# Altium PCB G4y_SuperCap.PcbDoc
Units mm, origin at the board's own origin, x right, y up, seen from the top; angles counter-clockwise.
Board outline 40 x 40 mm, 2 copper layers (Top Layer, Bottom Layer), stack 1.571 mm thick; 78 components, 61 nets, 229 pads, 119 vias.
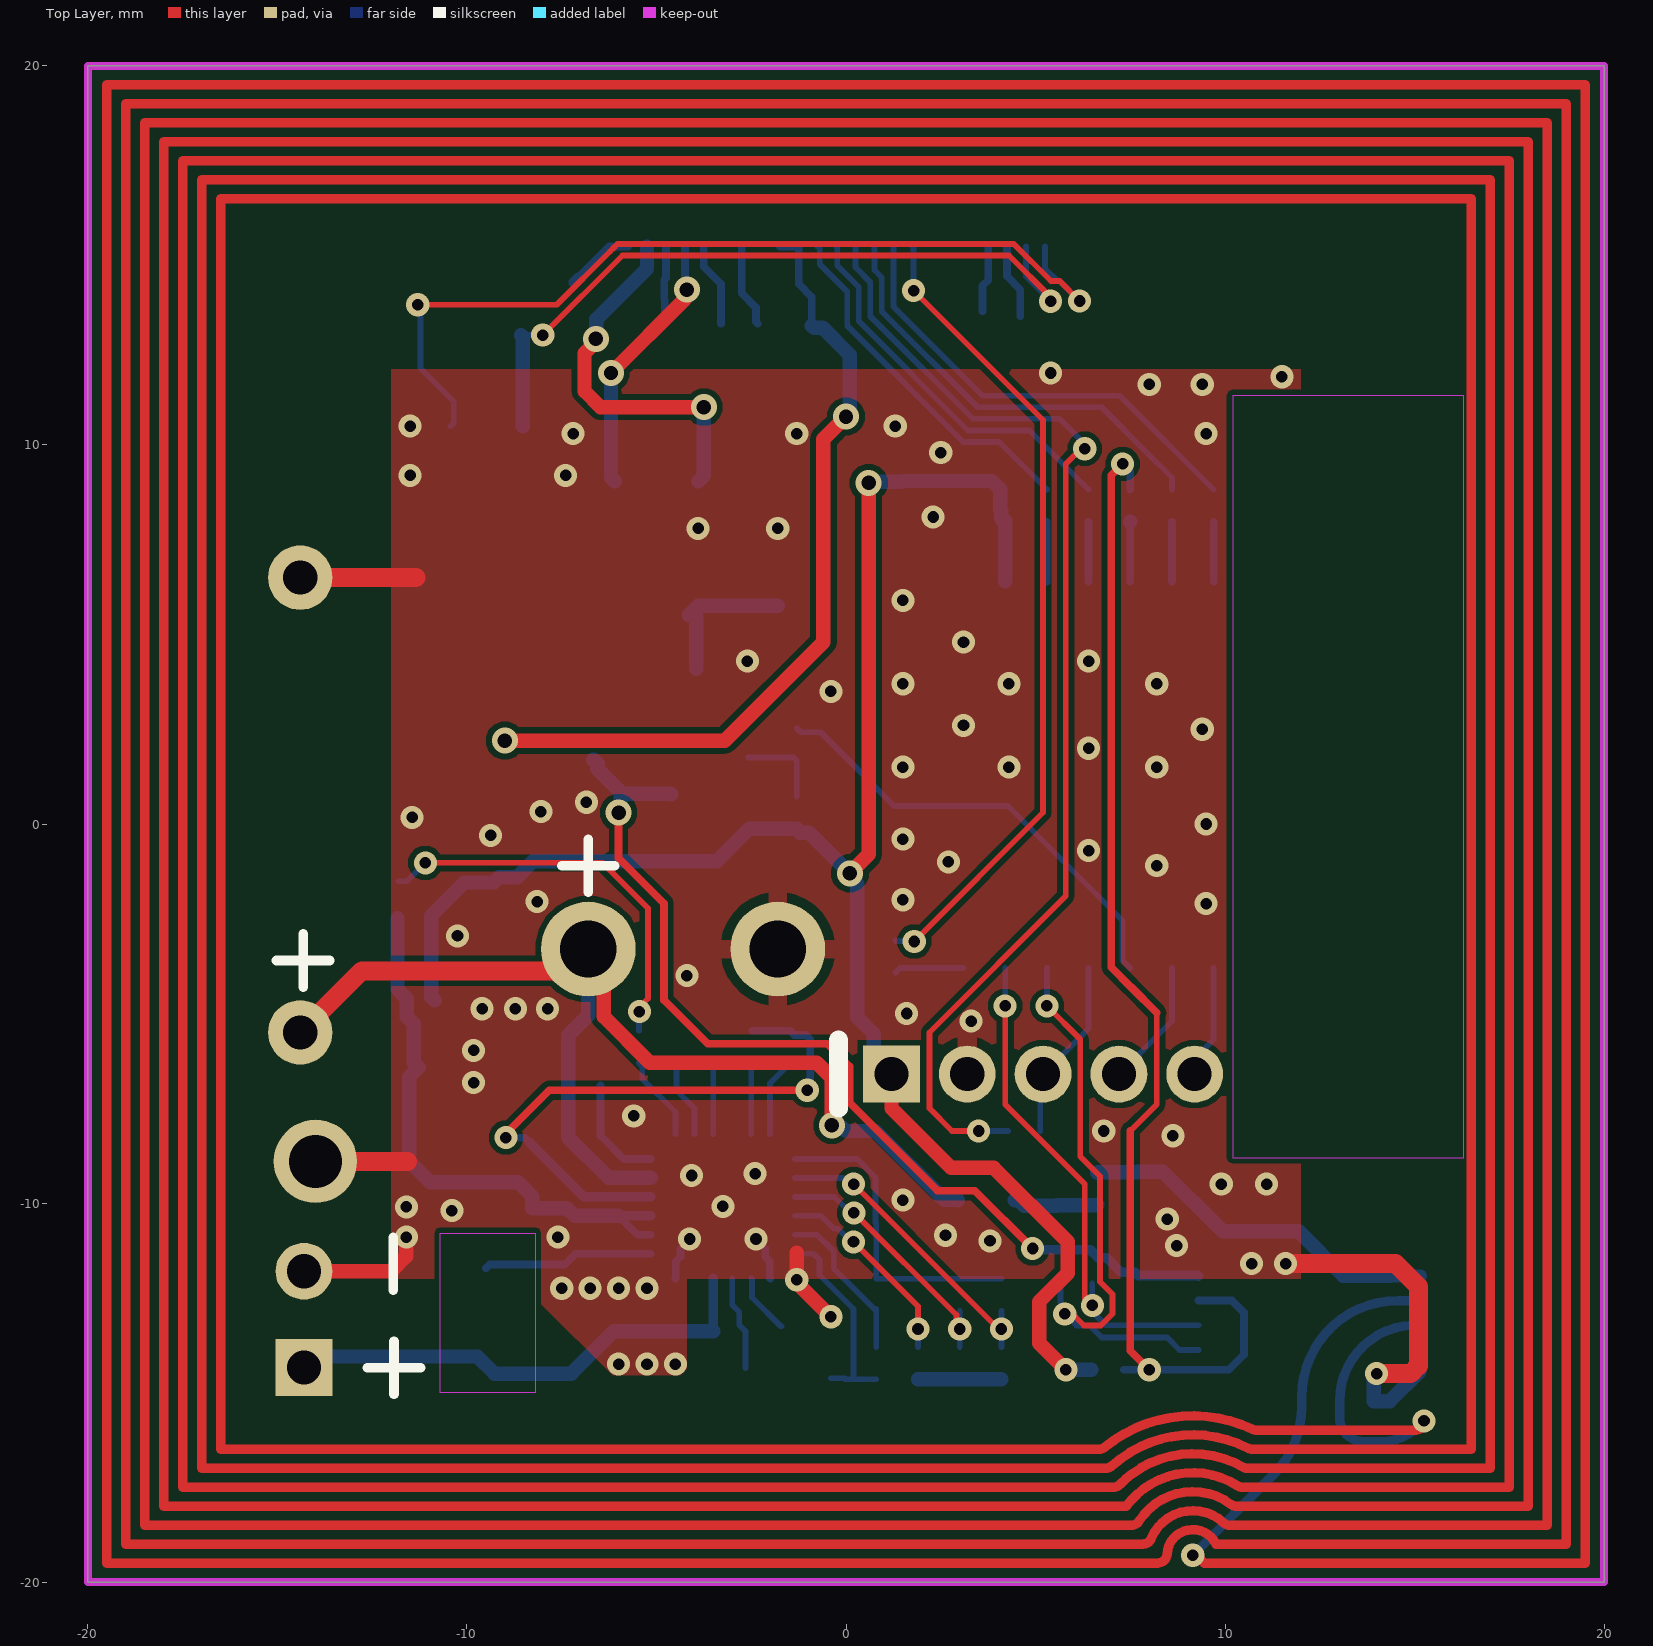
[diagram p0: Top Layer view]
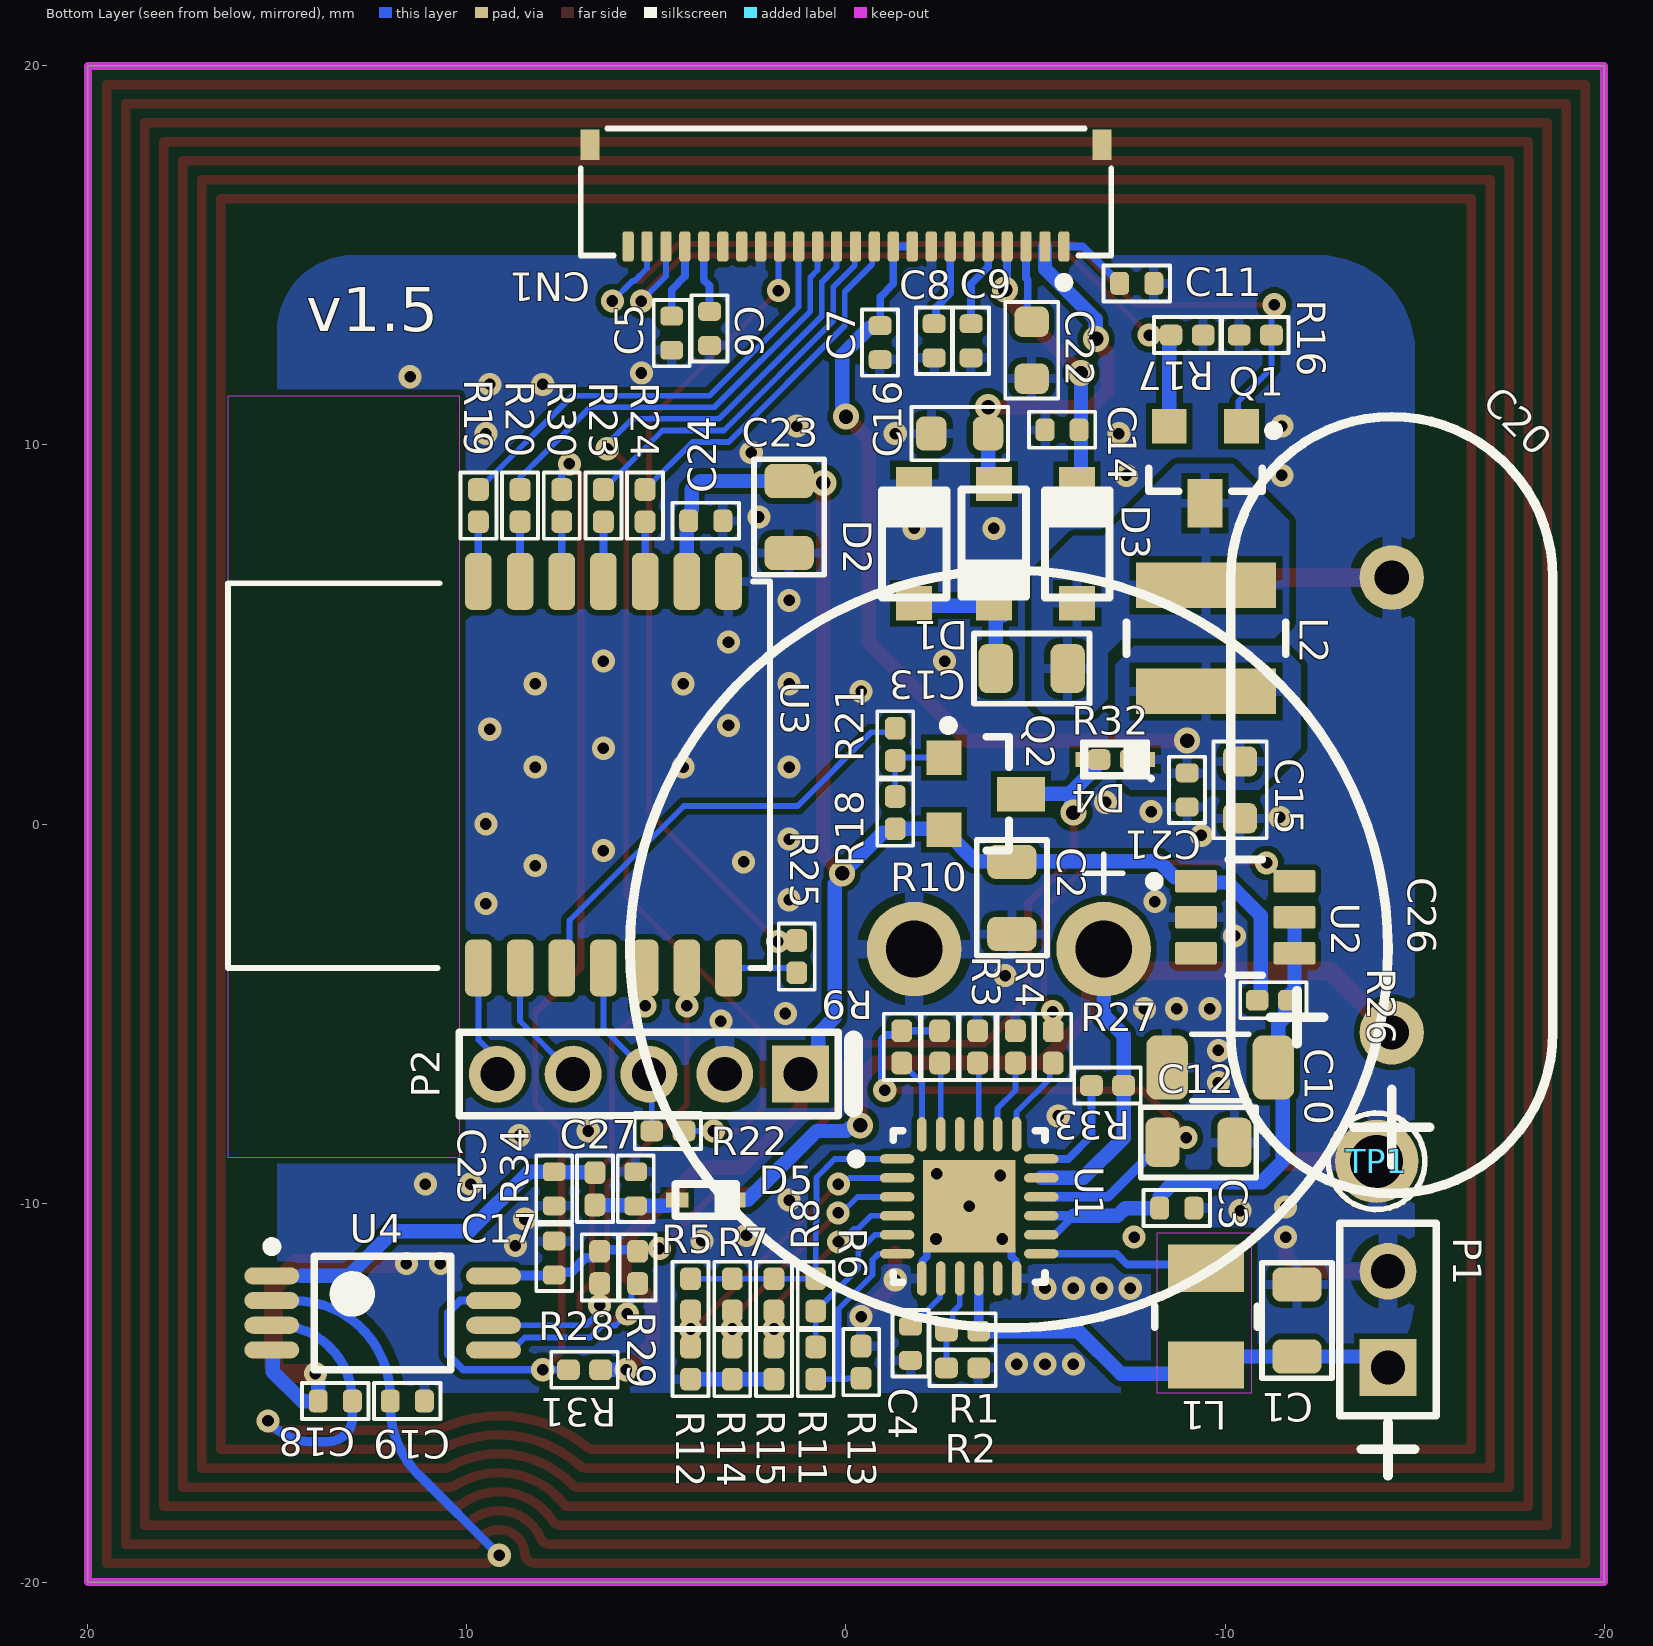
[diagram p1: Bottom Layer view, seen from below]

## Layer stack, top to bottom
Top Solder: solder mask 0.0102, Solder Resist, Dk 3.5
Top Layer: signal copper 0.0356
Dielectric 1: dielectric 1.5, FR-4, Dk 4.8
Bottom Layer: signal copper 0.0356
Bottom Solder: solder mask 0.0102, Solder Resist, Dk 3.5

## Board outline
-20,-20 20,-20 20,20 -20,20

## Design rules (kind name [scope] priority, off if disabled: settings)
Clearance Clearance_1 [InNet('NetR26_1')] p1: gap=0.152 ignorepadtopadclearanceinfootprint=FALSE except(1.5: Arc-Fill Arc-Poly Arc-Region Track-Fill Track-Poly Track-Region)
Clearance Clearance_NFC [InNetClass('NFC_Antenna')] p2: gap=0.25 ignorepadtopadclearanceinfootprint=FALSE
Clearance [All] p3: gap=0.152 ignorepadtopadclearanceinfootprint=FALSE
PolygonConnect PolygonConnect_Via [IsVia] p1: connectstyle=Direct reliefconductorwidth=0.254 reliefentries=4 polygonreliefangle="90 Angle" airgapwidth=0.254
PolygonConnect PolygonConnect_Direct [InPadClass('Direct')] p2: connectstyle=Direct reliefconductorwidth=0.254 reliefentries=4 polygonreliefangle="90 Angle" airgapwidth=0.254
PolygonConnect [All] p3: thpad.connectstyle=Relief thpad.reliefconductorwidth=0.5 thpad.reliefentries=4 thpad.polygonreliefangle="90 Angle" thpad.airgapwidth=0.254 smdpad.connectstyle=Relief smdpad.reliefconductorwidth=0.25 smdpad.reliefentries=4 smdpad.polygonreliefangle="90 Angle" smdpad.airgapwidth=0.16 via.connectstyle=Relief via.reliefconductorwidth=0.254 via.reliefentries=4 via.polygonreliefangle="90 Angle" via.airgapwidth=0.254
RoutingVias [All] p1: holewidth=20 width=0.864 viastyle="Through Hole" minholewidth=0.305 minwidth=0.61 maxholewidth=0.381 maxwidth=0.686
SolderMaskExpansion SolderMaskExpansion_Via [IsVia] p1: expansion=0.102 istentingtop=TRUE
SolderMaskExpansion [All] p2: expansion=0 istentingtop=FALSE
SupplyNets "Schematic Supply Nets_5" [InNet('3V3_SW')] p1: voltage=0.000
SupplyNets "Schematic Supply Nets_4" [InNet('3V3')] p2: voltage=0.000
SupplyNets "Schematic Supply Nets_3" [InNet('GND')] p3: voltage=0.000
SupplyNets "Schematic Supply Nets_2" [InNet('VSYS')] p4: voltage=0.000
SupplyNets "Schematic Supply Nets_1" [InNet('Vsolar')] p5: voltage=0.000
SupplyNets "Schematic Supply Nets" [InNet('3V3_EP')] p6: voltage=0.000
UnRoutedNet [All] p1: checkbadconnections=TRUE
Width Width_NFC [InNetClass('NFC_Antenna')] p1: maxlimit=0.25 minlimit=0.25 preferedwidth=0.25
Width Width_Power [InNetClass('Power')] p2: maxlimit=0.5 minlimit=0.203 preferedwidth=0.254
Width [All] p3: maxlimit=0.381 minlimit=0.152 preferedwidth=0.203
29 further rules are at their usual default settings.

## Classes and differential pairs
net class NFC_Antenna: NetC18_1
component class G4y_SuperCap: C17 C18 C19 C23 C24 C25 C27 C36 D5 P2 Q2 R18 R19 R20 R21 R22 R23 R24 R25 R28 R29 R30 R31 R34 U3 U4
pad class Direct: U3-25
net class Power: 3V3 3V3_SW GND NetC3_1 SUPERCAP_EH Vsolar VSYS

## Components (designator, comment, footprint, x,y, rotation, side; value= is the part's Value field where it differs from the comment)
C1 "Cap_0805_22uF/16V" C0805 -11.9,-13.1 r90 bottom value=22uF/16V
C2 "Cap_0805_22uF/16V" C0805 -4.375,-1.95 r270 bottom value=22uF/16V
C3 "Cap_0402_100n/16V" C0402 -8.727,-10.135 r180 bottom value=100nF/16V
C4 "Cap_0402_1uF/25V" C0402 -1.7,-13.7 r270 bottom value=1uF/25V
C5 "Cap_0402_1uF/25V" C0402 4.6,12.95 r270 bottom value=1uF/25V
C6 "Cap_0402_1uF/25V" C0402 3.6,13.075 r270 bottom value=1uF/25V
C7 "Cap_0402_1uF/25V" C0402 -0.9,12.7 r270 bottom value=1uF/25V
C8 "Cap_0402_1uF/25V" C0402 -2.325,12.75 r270 bottom value=1uF/25V
C9 "Cap_0402_1uF/25V" C0402 -3.3,12.75 r270 bottom value=1uF/25V
C10 "Cap_1206_47uF/10V" C1206 -9.875,-6.425 r0 bottom value=47uF/10V
C11 "Cap_0402_1uF/25V" C0402 -7.671,14.264 r180 bottom value=1uF/25V
C12 "Cap_0805_22uF/16V" C0805 -9.3,-8.4 r180 bottom value=22uF/16V
C13 "Cap_0805_4u7F/50V" C0805 -4.9,4.1 r180 bottom value=4u7F/50V
C14 "Cap_0402_1uF/25V" C0402 -5.7,10.4 r0 bottom value=1uF/25V
C15 "Cap_0603_4u7F/35V" C0603 -10.4,0.9 r270 bottom value=4u7F/25V
C16 "Cap_0603_1uF/50V" C0603 -3,10.3 r0 bottom value=1uF/50V
C17 "Cap_0402_100n/16V" C0402 7.7,-11.45 r90 bottom value=100nF/16V
C18 "Cap_0402_NP" C0402 13.475,-15.225 r0 bottom value=NP
C19 "Cap_0402_NP" C0402 11.575,-15.225 r180 bottom value=NP
C20 "SuperCap_1F/5V" DGH105Q5R5 -14.4,-5.5 r90 bottom locked value=1F/5V
C21 "Cap_0402_100n/16V" C0402 -9,0.9 r270 bottom value=100nF/16V
C22 "Cap_0603_1uF/50V" C0603 -4.9,12.5 r270 bottom value=1uF/50V
C23 "Cap_0805_22uF/16V" C0805 1.5,8.1 r270 bottom value=22uF/16V
C24 "Cap_0402_100n/16V" C0402 3.7,8 r180 bottom value=100nF/16V
C25 "Cap_0402_10nF/50V" C0402 7.7,-9.625 r270 bottom value=10nF/50V
C26 "SuperCap_0.47F/5.5V" SUPCAP_D20mm -6.8,-3.3 r270 bottom locked value=0.47F/5.5V
C27 "Cap_0402_100n/16V" C0402 5.55,-9.625 r90 bottom value=100nF/16V
CN1 "F3311A7H121024E200" F3311A7H121024E200 0,16 r0 bottom locked
D1 "MBR0530T1G" FP-SOD123-MFG -3.9,7.4 r90 bottom
D2 "MBR0530T1G" FP-SOD123-MFG -1.8,7.4 r270 bottom
D3 "MBR0530T1G" FP-SOD123-MFG -6.1,7.4 r270 bottom
D4 "Diode_1N4148WT" SODFL160X65-2N -7.1,1.7 r0 bottom
D5 "Diode_1N4148WT" SODFL160X65-2N 3.7,-9.925 r0 bottom
L1 "Inductor_22uH_550mA" FP-LQH32PB_NC-MFG -9.5,-13 r90 bottom value=22uH
L2 "10uH_1.44A_NRS4018T100MDGJ" FP-NRS4018-MFG -9.5,4.9 r90 bottom value=10uH
P1 "Header 2" HDR1X2 -14.3,-14.34 r90 bottom
P2 "Header 5 2mm" HDR1X5_2mm 5.2,-6.6 r0 bottom
Q1 "PMV65UNER" SOT-23-3 -9.483,9.479 r0 bottom
Q2 "BSS84AKBSS84AK,215" SOT-23-3 -3.6,0.8 r270 bottom
R1 "R_R0402_4M7" R0402 -3.078,-13.382 r180 bottom value=4M7
R2 "R_R0402_18M" R0402 -3.075,-14.35 r0 bottom value=18M
R3 "R_R0402_221k" R0402 -3.471,-5.881 r270 bottom value=221k
R4 "R_R0402_221k" R0402 -4.471,-5.881 r270 bottom value=221k
R5 "R_R0402_6M65" R0402 4.1,-12.425 r90 bottom value=6M65
R6 "R_R0402_6M65" R0402 0.8,-12.425 r90 bottom value=6M65
R7 "R_R0402_0R" R0402 3,-12.425 r90 bottom value=0r
R8 "R_R0402_6M65" R0402 1.9,-12.425 r90 bottom value=6M65
R9 "R_R0402_221k" R0402 -1.471,-5.881 r90 bottom value=221k
R10 "R_R0402_221k" R0402 -2.471,-5.881 r90 bottom value=221k
R11 "R_R0402_1M5" R0402 0.8,-14.225 r90 bottom value=1M5
R12 "R_R0402_4M7" R0402 4.1,-14.225 r90 bottom value=4M7
R13 "R_R0402_2M7" R0402 -0.4,-14.2 r270 bottom value=2M7
R14 "R_R0402_0R" R0402 3,-14.225 r90 bottom value=0r
R15 "R_R0402_2M55" R0402 1.9,-14.225 r90 bottom value=2M55
R16 "R_R0402_1M" R0402 -10.8,12.9 r180 bottom value=1M
R17 "R_R0402_0r47" R0402 -9,12.9 r0 bottom value=0r47
R18 "R_R0402_1M" R0402 -1.3,0.3 r270 bottom value=1M
R19 "R_R0402_22R" R0402 9.7,8.4 r270 bottom value=22R
R20 "R_R0402_22R" R0402 8.6,8.4 r270 bottom value=22R
R21 "R_R0402_22R" R0402 -1.3,2.1 r90 bottom value=22R
R22 "R_R0402_22R" R0402 4.7,-8.1 r0 bottom value=22R
R23 "R_R0402_22R" R0402 6.4,8.4 r270 bottom value=22R
R24 "R_R0402_22R" R0402 5.3,8.4 r270 bottom value=22R
R25 "R_R0402_22R" R0402 1.3,-3.5 r270 bottom value=22R
R26 "R_R0402_0R" R0402 -11.275,-4.65 r180 bottom value=0r
R27 "R_R0402_22R" R0402 -5.469,-5.882 r270 bottom value=22R
R28 "R_R0402_4k7" R0402 6.5,-11.7 r270 bottom value=4k7
R29 "R_R0402_4k7" R0402 5.5,-11.7 r270 bottom value=4k7
R30 "R_R0402_22R" R0402 7.5,8.4 r270 bottom value=22R
R31 "R_R0402_100k" R0402 6.9,-14.4 r180 bottom value=100k
R32 "R_R0402_39R" R0402 -7.1,1.7 r180 bottom value=39r
R33 "R_R0402_0R" R0402 -6.9,-6.9 r180 bottom value=0r
R34 "R_R0402_1k" R0402 6.625,-9.625 r90 bottom value=1k
TP1 "TestPoint Trough Hole" TestP-TH-1.32mm -14,-8.9 r180 bottom
U1 "ADP5091ACPZ-2-R7" FP-CP-24-14-IPC_B -3.25,-10.088 r180 bottom
U2 "TPS22860DBVR" SOT-23-6 -10.533,-2.463 r180 bottom
U3 "BLE Module" BC805M 6.4,1.3 r90 bottom
U4 "ST25DV04KC-IE6T3" TSOP65P640X120-8N 12.225,-12.9 r180 bottom

## Footprints (in the part's own frame and the unit in brackets; to place one, negate y for a bottom-side part, rotate by r counter-clockwise, add the part's x,y. Pads: shape width x height; smd on the part's side, far side on the other; paste and mask are expansions set on the pad)
BC805M [mm]
  rrect50% 1.5x0.7 smd: 1(-5.1,3.3) 2(-5.1,2.2) 3(-5.1,1.1) 4(-5.1,0) 5(-5.1,-1.1) 6(-5.1,-2.2) 7(-5.1,-3.3) 8(5.1,-3.3) 9(5.1,-2.2) 10(5.1,-1.1) 11(5.1,0) 12(5.1,1.1) 13(5.1,2.2) 14(5.1,3.3)
  silkscreen extent -5.12,-4.4 5.1,9.9, body extent -5.11,-4.4 5.09,9.9, height 2.21
C0402 [mm]
  rrect50% 0.5x0.6 smd: 1(-0.45,0) 2(0.45,0)
  silkscreen extent -0.87,-0.48 0.87,0.48, body extent -0.5,-0.25 0.5,0.25, height 0.48
C0603 [mm]
  rrect50% 0.8x0.9 smd: 1(-0.75,0) 2(0.75,0)
  silkscreen extent -1.28,-0.7 1.28,0.7, body extent -0.8,-0.4 0.8,0.4, height 0.9
C0805 [mm]
  rrect50% 0.9x1.3 smd: 1(-0.95,0) 2(0.95,0)
  silkscreen extent -1.53,-0.92 1.53,0.92, body extent -1,-0.63 1,0.62, height 1
C1206 [mm]
  rrect50% 1.1x1.7 smd: 1(-1.4,0) 2(1.4,0)
  silkscreen extent -0.75,-0.87 0.75,0.87, body extent -1.7,-0.9 1.7,0.9, height 0.89
DGH105Q5R5 [mm]
  round 1.7 hole 0.9: +(0,0) -(12,0)
  silkscreen extent -4.25,-4.25 16.25,4.25
F3311A7H121024E200 [mm]
  rrect50% 0.3x0.8 smd: 1(-5.75,0.762) 2(-5.25,0.762) 3(-4.75,0.762) 4(-4.25,0.762) 5(-3.75,0.762) 6(-3.25,0.762) 7(-2.75,0.762) 8(-2.25,0.762) 9(-1.75,0.762) 10(-1.25,0.762) 11(-0.75,0.762) 12(-0.25,0.762) 13(0.25,0.762) 14(0.75,0.762) 15(1.25,0.762) 16(1.75,0.762) 17(2.25,0.762) 18(2.75,0.762) 19(3.25,0.762) 20(3.75,0.762) 21(4.25,0.762) 22(4.75,0.762) 23(5.25,0.762) 24(5.75,0.762)
  rect 0.5x0.8 smd: MP1(-6.75,-1.925) MP2(6.75,-1.925)
  silkscreen extent -7,-2.35 7,1.84, body extent -7,-2.35 7,0.95, height 1.63
FP-CP-24-14-IPC_B [mm]
  oval 0.91x0.25 smd paste+0: 1(-1.901,1.25) 2(-1.901,0.75) 3(-1.901,0.25) 4(-1.901,-0.25) 5(-1.901,-0.75) 6(-1.901,-1.25) 13(1.901,-1.25) 14(1.901,-0.75) 15(1.901,-0.25) 16(1.901,0.25) 17(1.901,0.75) 18(1.901,1.25)
  oval 0.25x0.91 smd paste+0: 7(-1.25,-1.901) 8(-0.75,-1.901) 9(-0.25,-1.901) 10(0.25,-1.901) 11(0.75,-1.901) 12(1.25,-1.901) 19(1.25,1.901) 20(0.75,1.901) 21(0.25,1.901) 22(-0.25,1.901) 23(-0.75,1.901) 24(-1.25,1.901)
  rect 2.44x2.44 smd paste-1000: 25(0,0)
  silkscreen extent -3.11,-2 2,2, body extent -2,-2 2,2, height 0.8
FP-LQH32PB_NC-MFG [mm]
  rect 1.25x2 smd paste+0: 1(-1.275,0) 2(1.275,0)
  silkscreen extent -0.28,-1.35 0.28,1.35, body extent -1.6,-1.25 1.6,1.25, height 1.7
FP-NRS4018-MFG [mm]
  rect 1.2x3.7 smd paste+0: 1(-1.4,0) 2(1.4,0)
  silkscreen extent -0.43,-2.1 0.43,2.1, body extent -2,-2 2,2, height 1.8
FP-SOD123-MFG [mm]
  rect 0.9x0.95 smd paste+0: A(1.575,0) K(-1.575,0)
  silkscreen extent -1.4,-0.85 1.43,0.85, body extent -1.83,-0.77 1.83,0.77, height 1.45
HDR1X2 [mm] "Connector; Header; 2 Position"
  rect 1.5x1.5 hole 0.9: 1(0,0)
  round 1.5 hole 0.9: 2(2.54,0)
  silkscreen extent -1.27,-1.27 3.81,1.27
HDR1X5_2mm [mm] "Connector; Header; 5 Position"
  rect 1.5x1.5 hole 0.9: 1(-4,0)
  round 1.5 hole 0.9: 2(-2,0) 3(0,0) 4(2,0) 5(4,0)
  silkscreen extent -5,-1.1 5,1.1
R0402 [mm]
  rrect50% 0.6x0.55 smd: 1(-0.425,0) 2(0.425,0)
  silkscreen extent -0.87,-0.48 0.87,0.48, body extent -0.5,-0.25 0.5,0.25, height 0.35
SODFL160X65-2N [mm] "SODFL, 2-Leads, Body 0,80x1,60mm, IPC Medium Density"
  rect 0.6x0.4 smd: A(0.75,0) K(-0.75,0)
  silkscreen extent -1,-0.43 0.8,0.55, body extent -0.8,-0.43 0.8,0.43, height 0.65
SOT-23-3 [mil]
  rect 36x36 smd: 1(-37.5,-40) 2(37.5,-40)
  rect 36x50 smd: 3(0.5,40)
  silkscreen extent -76,-40 59,28, body extent -57,-46 57,46, height 39
SOT-23-6 [mm]
  rrect17% 1.1x0.6 smd paste+0 mask+0: 1(-1.3,0.95) 2(-1.3,0) 3(-1.3,-0.95) 4(1.3,-0.95) 5(1.3,0) 6(1.3,0.95)
  silkscreen extent -2.53,-1.53 0.45,1.53, body extent -1.4,-1.45 1.4,1.45, height 1.45
SUPCAP_D20mm [mm]
  round 2.5 hole 1.5: +(0,0) -(0,-5)
  silkscreen extent -10,-12.5 10,7.5, body extent -10,-12.5 10,7.5, height 8
TestP-TH-1.32mm [mm]
  round 2.2 hole 1.4: 0(0,0)
  silkscreen extent -1.28,-1.27 1.27,1.27, body extent -1.27,-1.26 1.27,1.26, height 4.88
TSOP65P640X120-8N [mm] "TSOP, 8-Leads, Body 3,00x4,40mm, Pitch 0,65mm, IPC Medium Density"
  oval 1.45x0.45 smd: 1(-2.925,0.975) 2(-2.925,0.325) 3(-2.925,-0.325) 4(-2.925,-0.975) 5(2.925,-0.975) 6(2.925,-0.325) 7(2.925,0.325) 8(2.925,0.975)
  silkscreen extent -3.05,-1.5 1.8,1.87, body extent -3.2,-1.5 3.2,1.5, height 1.2

## Part data
C1 C2 C12 C23: "22uF ±20% 16V Ceramic Capacitor X5R 0805", Case/Package=0805, LCSC=C98190, LCSC_Alt_1=C33546008, LCSC_Alt_2=C6119898, Manufacturer="Samsung Electro-Mechanics", PartNumber=CL21A226MOQNNNE, Voltage Rating=16V
C3 C17 C21 C24 C27: "16V 100nF X7R ±10% 0402 Multilayer Ceramic Capacitors MLCC - SMD/SMT ROHS", Case/Package=0402, LCSC=C1525, LCSC_Alt_1=C22435936, LCSC_Alt_2=C576716, Manufacturer="Samsung Electro-Mechanics", PartNumber=CL05B104KO5NNNC, Voltage Rating=16V
C4 C5 C6 C7 C8 C9 C11 C14: "1uF ±10% 25V Ceramic Capacitor X5R 0402", Case/Package=0402, LCSC=C52923, LCSC_Alt_1=C7393852, LCSC_Alt_2=C7472946, Manufacturer="Samsung Electro-Mechanics", PartNumber=CL05A105KA5NQNC, Voltage Rating=25V
C10: "47uF ±20% 10V Ceramic Capacitor X5R 1206", Case/Package=1206, LCSC=C96123, LCSC_Alt_1=C7432787, LCSC_Alt_2=C6119971, Manufacturer="Samsung Electro-Mechanics", PartNumber=CL31A476MPHNNNE, Voltage Rating=10V
C13: "4.7uF ±10% 50V Ceramic Capacitor X5R 0805", Case/Package=0805, LCSC=C7472969, LCSC_Alt_1=C513770, LCSC_Alt_2=C2903668, PartNumber=HGC0805R5475K500NSLJ, Voltage Rating=50V
C15: "4.7uF ±10% 35V Ceramic Capacitor X5R 0603", Case/Package=0603, LCSC=C307467, LCSC_Alt_1=C6119851, LCSC_Alt_2=C22367829, Manufacturer="Samsung Electro-Mechanics", PartNumber=CL10A475KL8NRNC, Voltage Rating=35V
C16 C22: "50V 1uF X5R ±10% 0603 Ceramic Capacitors ROHS", Case/Package=0603, LCSC=C15849, LCSC_Alt_1=C6119852, LCSC_Alt_2=C380313, Manufacturer="Samsung Electro-Mechanics", PartNumber=CL10A105KB8NNNC, Voltage Rating=50V
C18 C19: Case/Package=0402
C20: "DGH Series 5.5 v 1.0 F 17x17x8.5mm LS=12mm Radial Super Capacitor", Case/Package=Radial, Manufacturer="CDE Illinois Capacitor", PartNumber=DGH105Q5R5, Voltage=5V
C25: "10nF ±10% 50V Ceramic Capacitor X7R 0402", Case/Package=0402, LCSC=C15195, LCSC_Alt_1=C6119808, LCSC_Alt_2=C5137480, Manufacturer="Samsung Electro-Mechanics", PartNumber=CL05B103KB5NNNC, Voltage Rating=50V
C26: "Super cap D=20mm H=8mm", Voltage=5.5V
CN1: "FFC/FPC Connector 24 Position 0.5mm Pitch Double-Sided Contacts, Top and Bottom Entry Surface Mount, Right Angle -55℃~+85℃", LCSC=C3168055, LCSC_Alt_1=C52722656, LCSC_Alt_2=C48678015, Manufacturer="Amphenol ICC / FCI", Mount=SMD, Number of Contacts=24P, Number of Positions=24P, Number of Rows=1, Orientation=Righht, PartNumber=F3311A7H121024E200, Pitch=0.5mm
D1 D2 D3: "Diode 30V 500mA Surface Mount SOD-123", LCSC=C82046, LCSC_Alt_1=C5204746, LCSC_Alt_2=C236079, Manufacturer=Onsemi, Package=SOD-123, PartNumber=MBR0530T1G
D4 D5: "Diode Independent 80V 125mA Surface Mount SOD-523", Case/Package=SOD-523, LCSC=C83482, LCSC_Alt_1=C727112, LCSC_Alt_2=C5381437, Manufacturer=Diodes, PartNumber=1N4148WT-7, Category="Rectifier Diodes"
L1: "550mA 22uH ±20% 685mΩ 650mA 1210 Fixed Inductors RoHS", LCSC=C4153652, LCSC_Alt_1=C53224120, LCSC_Alt_2=C22463994, Manufacturer=Murata, Package=1210, Part Number=LQH32PZ220MNCL, Saturation Current=650mA
L2: "1.2A 10uH ±20% 1.3A 150mΩ SMD,4x4mm Fixed Inductors RoHS", LCSC=C222882, LCSC_Alt_1=C2041931, Manufacturer="Taiyo Yuden", Package=4018, Part Number=NRS4018T100MDGJ, Saturation Current=1.3A
P1: "Header, 2-Pin"
P2: "Header, 5-Pin"
Q1: "N-Channel 20V 2.8A 940mW Surface Mount SOT-23", LCSC=C179446, Manufacturer=Nexperia, Category=MOSFETs, PartNumber=PMV65UNER
Q2: "P-Channel 50V 180mA 420mW Surface Mount SOT-23", LCSC=C127273, LCSC_Alt_1=C549760, LCSC_Alt_2=C7379993, Manufacturer=Nexperia, PartNumber=BSS84AK,215, Category=MOSFETs
R1 R12: "4.7MΩ ±1% 62.5mW 0402 Thick Film Resistor", Case/Package=0402, LCSC=C474132, LCSC_Alt_1=C354978, LCSC_Alt_2=C49654986, Manufacturer=UNI-ROYAL, PartNumber=0402WGF4704TCE, Tolerance=1%
R2: "0402, 1% ,63mW", Case/Package=0402, LCSC=C423222, Manufacturer=UNI-ROYAL, PartNumber=0402WGF1805TCE, Tolerance=1
R3 R4 R9 R10: "221kΩ ±1% 62.5mW 0402 Thick Film Resistor", Case/Package=0402, LCSC=C26998, LCSC_Alt_1=C2998126, LCSC_Alt_2=C49653699, Manufacturer=UNI-ROYAL, PartNumber=0402WGF2213TCE, Tolerance=1%
R5 R6 R8: "6.65MΩ ±1% 62.5mW 0402 Thick Film Resistor", Case/Package=0402, LCSC=C620472, LCSC_Alt_1=C172116, LCSC_Alt_2=C477773, Manufacturer=UNI-ROYAL, PartNumber=0402WGF6654TCE, Tolerance=1%
R7 R14 R26 R33: "0Ω 62.5mW 50V Thick Film Resistor ±5% 0402 Chip Resistor - Surface Mount ROHS", Case/Package=0402, LCSC=C21376, LCSC_Alt_1=C106231, LCSC_Alt_2=C2906877, Manufacturer=UNI-ROYAL, PartNumber=0402WGJ0000TCE, Tolerance=5%
R11: "1.5MΩ ±1% 62.5mW 0402 Thick Film Resistor", Case/Package=0402, LCSC=C22276, LCSC_Alt_1=C49653927, LCSC_Alt_2=C2930014, Manufacturer=UNI-ROYAL, PartNumber=0402WGF1504TCE, Tolerance=1%
R13: "2.7MΩ ±1% 62.5mW 0402 Thick Film Resistor", Case/Package=0402, LCSC=C270621, LCSC_Alt_1=C3013160, LCSC_Alt_2=C49653355, Manufacturer=UNI-ROYAL, PartNumber=0402WGF2704TCE, Tolerance=1%
R15: "2.55MΩ ±1% 62.5mW 0402 Thick Film Resistor", Case/Package=0402, LCSC=C423206, LCSC_Alt_1=C477654, LCSC_Alt_2=2612093, Manufacturer=UNI-ROYAL, PartNumber=0402WGF2554TCE, Tolerance=1%
R16 R18: "1MΩ ±1% 62.5mW 0402 Thick Film Resistor", Case/Package=0402, LCSC=C26083, LCSC_Alt_1=C2909328, LCSC_Alt_2=C2770623, Manufacturer=UNI-ROYAL, PartNumber=0402WGF1004TCE, Tolerance=1%
R17: "0402, 1% ,63mW", Case/Package=0402, LCSC=C423162, PartNumber=RL0402JR-070R47L
R19 R20 R21 R22 R23 R24 R25 R27 R30: "22Ω ±1% 62.5mW 0402 Thick Film Resistor", Case/Package=0402, LCSC=C25092, LCSC_Alt_1=C49654869, LCSC_Alt_2=C2929994, Manufacturer=UNI-ROYAL, PartNumber=0402WGF220JTCE, Tolerance=1%
R28 R29: "0402, 1% ,63mW", Case/Package=0402, LCSC=C25900, PartNumber=0402WGF4701TCE
R31: "0402, 1% ,63mW", Case/Package=0402, LCSC=C25741, PartNumber=ERA-2VEB1003X
R32: "39Ω ±1% 62.5mW 0402 Thick Film Resistor", Case/Package=0402, LCSC=C25110, LCSC_Alt_1=C2770700, LCSC_Alt_2=C2909354, Manufacturer=UNI-ROYAL, PartNumber=0402WGF390JTCE, Tolerance=1%
R34: "0402, 1% ,63mW", Case/Package=0402, LCSC=C25543, Manufacturer=UNI-ROYAL, PartNumber=0402WGJ0102TCE, Tolerance=1%
TP1: library part TestPoint-TH, PartNumber=RS-200-208
U1: "-40℃~+125℃ 100mV~3.3V 1A 2V 360nA Charging IC、Protection IC Not supported Supercapacitor、Lithium Battery LFCSP-24(4x4) Battery Management ROHS", Case/Package=LFCSP-24(4x4), LCSC=C579259, Manufacturer="Analog Devices", PartNumber=ADP5091ACPZ-2-R7
U2: "Ultra-Low Leakage Current Single-Channel Load Switch", LCSC=C132005, Manufacturer="Texas Instruments", Package=SOT-23-6, PartNumber=TPS22860DBVR
U3: library part BC805M, "Bluetooth Modules - 802.15.1 Bluetooth Low Energy, BLE 5.2 Module using Nordic nRF52805 SoC with integrated antenna", LCSC=C6751361, Manufacturer=Fanstel, PartNumber=BC805M
U4: "53Kbit/s ISO 15693,NFC I2C TSSOP-8 RFID, RF Access, Monitoring ICs RoHS", Case/Package=TSSOP, LCSC=C5221719, LCSC_Alt_1=C5267455, Manufacturer=STMicroelectronics, Organization=512X8, PartNumber=ST25DV04KC-IE6T3

## Via types
v1: diameter 0.61, hole 0.305, Top Layer to Bottom Layer, tented both sides, 109 vias
v2: diameter 0.686, hole 0.381, Top Layer to Bottom Layer, tented both sides, 10 vias

## Nets (pads, with @x,y where several pads share a name; then routed paths per layer and width w, separated by ;. In a path a pad name is that pad's centre, name@x,y a point inside that pad or via, vN(x,y) a via of type N, cw(c..) or ccw(c..) an arc to the next point about the centre after c; other vN are vias at no path point)
3V3: C2.1 C23.1 C24.1 P2.1 Q2.2 R18.2 R26.1 R31.2 U2.1 U3.9 | length 48.7
  Top Layer w0.381: v2(0.1,-1.3) 0.6,-0.8 v2(0.6,9) ; P2.1 1.2,-7.5 2.775,-9.075 3.9,-9.075 5.848,-11.023 5.848,-11.852 5.1,-12.6 5.1,-13.7 v1(5.8,-14.4)
  Bottom Layer w0.381: R26.1 -10.856,-4.65 -10.94,-4.566 -10.94,-3 -10.94,-2.415 -10.068,-1.543 -9.289,-1.543 -9.149,-1.403 -8.678,-1.403 -8.258,-0.982 -4.375,-0.982 -3.414,-0.982 Q2.2 -2.557,-0.125 R18.2 -1.3,-0.15 -1.215,-0.234 -0.966,-0.234 v2(0.1,-1.3) 0.1,-1.382 0.3,-1.582 0.3,-5.1 0.727,-5.527 0.727,-6.127 P2.1 ; v2(0.6,9) 0.625,9.025 1.475,9.025 C23.1 3.85,9.05 4.073,8.827 4.073,8.284 4.091,8.267 4.091,8.059 C24.1 ; U3.9 C24.1@4.2,8 ; v1(5.8,-14.4) R31.2
3V3_EP: C7.1 C15.1 C21.1 CN1.9 CN1.10 D4.K L2.1 R32.2 | length 21.4
  Top Layer w0.381: v2(-9,2.2) -3.2,2.2 -0.6,4.8 -0.6,10.151 -0.377,10.374 ; -0.376,10.374 v2(0,10.75)
  Bottom Layer w0.203: CN1.9 CN1.10 -1.25,14.253 -0.9,13.903 C7.1
  Bottom Layer w0.381: C7.1 -0.841,13.09 -0.615,13.09 0.1,12.375 0.1,10.932 0,10.832 v2(0,10.75)
3V3_PWR: Q2.1 R18.1 R21.1 | length 2.3
  Bottom Layer w0.152: Q2.1 -1.378,1.753 R21.1 R18.1
3V3_SW: C17.1 D4.A Q2.3 R28.1 R29.1 R32.1 U4.8 | length 26.3
  Top Layer w0.203: v2(-6,0.3) -6,-0.9 -4.8,-2.1 -4.8,-4.65 -3.65,-5.8 -0.5,-5.8 0.1,-6.4 0.1,-7.359 2.416,-9.675 3.4,-9.675 v1(4.925,-11.2)
  Bottom Layer w0.254: v1(4.925,-11.2) 4.962,-11.237 6.463,-11.237 R28.1 ; R28.1@6.5,-11.294 6.647,-11.442 6.873,-11.442 7.262,-11.831 7.631,-11.831 7.712,-11.913 9.288,-11.913 U4.8
  Bottom Layer w0.381: R32.1 R32.1@-6.65,1.7 ; R32.1@-6.55,1.6 R32.1@-6.65,1.7 ; v2(-6,0.3) -5.942,0.358 -5.942,0.755 -5.901,0.795 ; Q2.3 -4.624,0.795 -5.901,0.795 ; R32.1@-6.65,1.7 -6.566,1.615 -6.566,1.459 -5.901,0.795
DIS_SW: U1.22
DISP_BUSY: CN1.16 R25.1 | length 21.7
  Top Layer w0.152: v1(1.783,14.075) 5.2,10.658 5.2,0.3 v1(1.8,-3.1)
  Bottom Layer w0.152: R25.1 1.312,-3.087 1.787,-3.087 v1(1.8,-3.1) ; CN1.16 1.783,15.205 v1(1.783,14.075)
DISP_CS: CN1.13 R22.1 | length 30.4
  Top Layer w0.152: v1(3.5,-8.1) 2.8,-8.1 2.2,-7.5 2.2,-5.5 5.8,-1.9 5.8,9.5 6.2,9.9 v1(6.3,9.9)
  Bottom Layer w0.152: CN1.13 0.25,14.687 0.64,14.297 0.64,13.397 3.347,10.69 5.635,10.69 6.2,10.125 v1@6.2,10.1 ; v1(3.5,-8.1) R22.1
DISP_D/C: CN1.14 R20.1 | length 11.6
  Bottom Layer w0.152: CN1.14 0.75,14.618 0.945,14.423 0.945,13.524 3.474,10.995 6.748,10.995 7.964,9.779 8.6,9.143 R20.1
DISP_RES: CN1.15 R19.1 | length 12
  Bottom Layer w0.152: CN1.15 1.25,13.65 3.6,11.3 7.225,11.3 R19.1
DISP_SCK: CN1.12 R23.1 | length 10.1
  Bottom Layer w0.152: CN1.12 -0.229,15.217 -0.229,14.735 0.336,14.17 0.336,13.271 3.221,10.386 4.839,10.386 R23.1
DISP_SDI: CN1.11 R24.1 | length 9.5
  Bottom Layer w0.152: CN1.11 -0.694,15.182 -0.694,14.769 0.031,14.044 0.031,13.145 3.095,10.081 4.044,10.081 R24.1
GDR: CN1.23 Q1.1 R16.2 | length 24.2
  Top Layer w0.152: v1(-11.3,13.7) -7.631,13.7 -6.226,15.105 -6.126,15.205 -6.026,15.305 4.426,15.305 5.406,14.325 5.637,14.325 v1(6.162,13.8)
  Bottom Layer w0.152: v1(-11.3,13.7) -11.225,13.625 R16.2 -11.225,12.025 -10.35,11.15 -10.35,10.581 Q1.1 ; CN1.23 5.25,14.658 5.574,14.333 5.629,14.333 v1(6.162,13.8)
GND: C1.2 C2.2 C3.2 C4.2 C5.2 C6.2 C7.2 C8.2 C9.2 C10.2 C11.2 C12.2 C14.2 C15.2 C16.2 C17.2 C18.2 C19.2 C20.- C21.2 C22.2 C23.2 C24.2 C25.2 C26.- C27.2 CN1.8 CN1.17 D2.K P1.2 P2.2 R2.1 R3.1 R4.1 R12.1 R13.1 R14.1 R15.1 R16.1 R17.1 TP1.0 U1.7 U1.12 U1.25 U2.2 U3.8 U4.4 | length 25.4
  Top Layer w0.381: P1.2 -12,-11.8 -11.6,-11.4 v1(-11.6,-10.9) ; -1.3,-11.317 v1(-1.3,-12.025) -1.256,-12.069 -1.256,-12.144 v1(-0.4,-13)
  Top Layer w0.5: C20.- -11.35,6.5 ; TP1.0 -11.575,-8.9 ; v1(11.6,-11.6) 14.5,-11.6 15.1,-12.2 15.1,-14.3 14.9,-14.5 v1(14,-14.5)
  Bottom Layer w0.203: U1.12 -4.491,-11.98 -4.491,-11.544 -4.368,-11.421 -4.368,-11.207 U1.25@-4.125,-10.963 ; v1(-2.375,-10.95) -2.132,-11.193 -2.132,-11.421 -2.009,-11.544 -2.009,-11.98 U1.7
  Bottom Layer w0.381: R15.1 R14.1 3.55,-14.65 R12.1 ; v1(14,-14.5) 13.925,-14.575 C18.2 14.35,-15.225 15.127,-14.448 15.127,-13.898 U4.4
  other v1: -6,-14.25 -5.25,-14.25 -4.5,-14.25 -7.5,-12.25 -6.75,-12.25 -6,-12.25 -5.25,-12.25 10.7,-11.6 8.725,-11.125 3.8,-11 -4.125,-10.95 -7.6,-10.9 2.625,-10.85 8.475,-10.425 -10.4,-10.2 -11.6,-10.101 -3.25,-10.088 1.5,-9.925 9.9,-9.5 11.1,-9.5 -4.075,-9.275 -2.4,-9.225 8.625,-8.225 6.8,-8.1 -5.6,-7.7 -9.825,-6.825 -9.825,-5.975 3.3,-5.2 1.6,-5 -9.6,-4.875 -8.725,-4.875 -7.875,-4.875 -4.2,-4 -10.25,-2.95 9.5,-2.1 -8.15,-2.05 1.5,-2 8.2,-1.1 2.7,-1 6.4,-0.7 1.5,-0.4 -9.375,-0.3 9.5,0 -11.45,0.175 -8.05,0.325 -6.85,0.575 1.5,1.5 4.3,1.5 8.2,1.5 6.4,2 9.4,2.5 3.1,2.6 -0.4,3.5 1.5,3.7 4.3,3.7 8.2,3.7 -2.6,4.3 6.4,4.3 3.1,4.8 1.5,5.9 -3.9,7.8 -1.8,7.8 2.3,8.1 -11.5,9.2 -7.4,9.2 2.5,9.8 -7.2,10.3 -1.3,10.3 9.5,10.3 -11.5,10.5 1.3,10.5 8,11.6 9.4,11.6 11.5,11.8 5.4,11.9
GPO: R30.1 R31.1 U4.7 | length 31.3
  Top Layer w0.153: 7.5,-8.1 8.2,-7.4 8.2,-4.981
  Top Layer w0.203: v1(7.3,9.5) 7,9.2 7,-3.782 7.518,-4.3 8.2,-4.981 ; 7.5,-8.1 7.5,-13.9 v1(8,-14.4)
  Bottom Layer w0.203: v1(7.3,9.5) 7.5,9.3 R30.1 ; R31.1 v1(8,-14.4) ; v1@8.3,-14.4 10.1,-14.4 10.5,-14 10.5,-12.89 10.185,-12.575 U4.7
LLD: U1.11
NetC3_1: C3.1 C10.1 R26.2 U1.14 U1.15 U2.4 U2.5 | length 15
  Bottom Layer w0.203: -6.007,-10.338 -5.53,-10.815 -5.517,-10.815 -5.494,-10.838 U1.14
  Bottom Layer w0.254: -6.007,-10.338 U1.15
  Bottom Layer w0.381: U2.4 -11.833,-4.367 -11.59,-4.61 -11.59,-5.085 -11.405,-5.27 -11.405,-6.295 C10.1 -11.525,-6.675 -11.525,-8.9 -10.972,-9.453 -8.652,-9.453 -8.277,-9.828 C3.1 -7.365,-10.135 -7.162,-10.338 -6.007,-10.338 ; U2.5@-11.833,-2.488 -11.833,-3.388 U2.4@-11.821,-3.4
NetC4_1: C4.1 U1.8 | length 1.6
  Bottom Layer w0.152: U1.8 -2.481,-12.008 -2.481,-12.492 -1.724,-13.25 C4.1
NetC5_1: C5.1 CN1.21 | length 2
  Bottom Layer w0.203: CN1.21 4.25,14.45 4.6,14.1 C5.1
NetC6_1: C6.1 CN1.20 | length 1.8
  Bottom Layer w0.203: C6.1 3.6,14.2 3.75,14.35 CN1.20
NetC8_1: C8.1 CN1.7 | length 2.2
  Bottom Layer w0.203: CN1.7 -2.75,14 -2.376,13.626 -2.376,13.251 C8.1
NetC9_1: C9.1 CN1.5 | length 2.2
  Bottom Layer w0.203: CN1.5 -3.75,14.7 -3.3,14.25 C9.1
NetC13_1: C13.1 D1.K D2.A | length 4.1
  Bottom Layer w0.381: C13.1 -3.95,5.495 -3.967,5.512 -4.15,5.512 -3.9,5.762 D2.A@-1.8,5.762
NetC13_2: C13.2 D3.A L2.2 Q1.3
NetC18_1: C18.1 C19.1 U4.2 U4.3 | length 1033.3
  Top Layer w0.25: v1(9.15,-19.295) 9.247,-19.295 9.452,-19.5 19.5,-19.5 19.5,19.5 -19.5,19.5 -19.5,-19.5 8.222,-19.5 ccw(c8.221,-19.25) 8.471,-19.263 cw(c9.15,-19.295) 9.762,-19 19,-19 19,-18.725 19,19 -19,19 -19,-19 7.829,-19 ccw(c7.828,-18.75) 8.059,-18.846 cw(c9.15,-19.295) 9.956,-18.433 ccw(c10.126,-18.25) 10.125,-18.5 18.5,-18.5 18.5,18.5 -18.5,18.5 -18.5,-18.5 7.529,-18.5 ccw(c7.528,-18.25) 7.737,-18.386 cw(c9.15,-19.295) 8.499,-17.747 cw(c9.15,-19.295) 10.157,-17.951 ccw(c10.306,-17.75) 10.305,-18 18,-18 18,18 -18,18 -18,-18 2.5,-18 7.395,-18 ccw(c7.211,-17.831) 7.41,-17.982 cw(c9.15,-19.295) 7.849,-17.547 cw(c9.15,-19.295) 10.328,-17.461 ccw(c10.462,-17.25) 10.461,-17.5 17.5,-17.5 17.5,17.5 -17.5,17.5 -17.5,-17.5 7.053,-17.5 ccw(c7.052,-17.25) 7.231,-17.425 cw(c9.15,-19.295) 7.55,-17.145 cw(c9.15,-19.295) 10.478,-16.968 ccw(c10.601,-16.75) 10.6,-17 17,-17 17,17 -17,17 -17,-17 6.852,-17 ccw(c6.851,-16.75) 7.018,-16.936 cw(c9.15,-19.295) 7.494,-16.581 cw(c9.15,-19.295) 10.614,-16.473 ccw(c10.728,-16.25) 10.727,-16.5 16.5,-16.5 16.5,16.5 -16.5,16.5 -16.5,-16.5 6.667,-16.5 ccw(c6.666,-16.25) 6.823,-16.444 cw(c9.15,-19.295) 10.739,-15.976 ccw(c10.846,-15.75) 10.844,-16 15,-16 ccw(c15,-15.75) v1(15.25,-15.75)
  Bottom Layer w0.25: v1(9.15,-19.295) 11.281,-17.164 ccw(c9.485,-15.368) 12.025,-15.368 C19.1 12.025,-15.115 cw(c14.565,-15.115) 14.565,-12.575 U4.2 ; U4.3 15.025,-13.225 ccw(c15.025,-15.225) 14.532,-13.287 ccw(c14.65,-13.875) 14.448,-13.31 ccw(c15.025,-15.225) C18.1 13.025,-15.678 ccw(c13.622,-15.678) 13.2,-16.1 ccw(c13.683,-15.617) 13.683,-16.3 14.1,-16.3 ccw(c14.1,-14.851) 15.124,-15.876 v1(15.25,-15.75)
NetC22_1: C22.1 CN1.3 | length 2.1
  Bottom Layer w0.203: C22.1 -4.78,13.37 -4.78,13.836 -4.797,13.853 -4.797,14.362 -4.75,14.408 CN1.3
NetC25_1: C25.1 R34.2 U4.1 | length 9.7
  Bottom Layer w0.35: 14.359,-11.925 U4.1
  Bottom Layer w0.381: R34.2 6.638,-9.187 7.688,-9.187 C25.1 8.362,-9.175 9.937,-10.75 11.95,-10.75 13.125,-11.925 14.359,-11.925
NetC27_1: C27.1 D5.A R34.1 | length 2.2
  Bottom Layer w0.381: D5.A 4.55,-9.925 4.7,-10.075 C27.1 5.563,-10.062 6.613,-10.062 R34.1
NetL1_2: L1.2 U1.13 | length 4.5
  Bottom Layer w0.203: L1.2 -9.4,-11.625 -7.425,-11.625 -7.138,-11.338 -5.2,-11.338 U1.13
NetR1_1: R1.1 R2.2 U1.9 | length 2.5
  Bottom Layer w0.152: U1.9 -3,-12.694 -2.815,-12.878 -2.815,-13.22 -2.701,-13.334 -2.651,-13.384 R2.2 R2.2
NetR3_2: R3.2 U1.21 | length 1.9
  Bottom Layer w0.152: U1.21 -3.5,-6.335 R3.2
NetR4_2: R4.2 U1.20 | length 2.1
  Bottom Layer w0.152: R4.2 -4.471,-7.029 -4,-7.5 U1.20
NetR5_1: R5.1 R12.2 U1.2 | length 8.1
  Top Layer w0.152: v1(0.2,-9.5) 4.025,-13.325 v1(4.1,-13.325)
  Bottom Layer w0.152: U1.2 -0.086,-9.338 0.076,-9.5 v1(0.2,-9.5) ; R12.2 v1(4.1,-13.325) R5.1
NetR5_2: R5.2 R6.2 R7.2 R8.2 U1.1 | length 8.3
  Bottom Layer w0.152: U1.1 0.295,-8.838 0.781,-9.324 0.781,-10.521 0.8,-10.54 R6.2 R8.2 R7.2 R5.2
NetR6_1: R6.1 R11.2 U1.5 | length 4.2
  Bottom Layer w0.152: U1.5 -0.762,-10.838 -0.325,-11.275 -0.325,-11.725 R6.1 ; R11.2 R6.1@0.8,-12.8
NetR7_1: R7.1 R14.2 U1.3 | length 6.9
  Top Layer w0.152: v1(0.209,-10.263) 0.218,-10.263 2.913,-12.957 2.913,-13.238 v1(3,-13.325)
  Bottom Layer w0.152: U1.3 -0.304,-9.838 0.121,-10.263 v1(0.209,-10.263) ; R14.2 v1(3,-13.325) R7.1
NetR8_1: R8.1 R15.2 U1.4 | length 5.8
  Top Layer w0.152: v1(0.198,-11.025) 1.9,-12.727 v1(1.9,-13.325)
  Bottom Layer w0.152: U1.4 -0.662,-10.338 -0.319,-10.681 -0.212,-10.681 0.133,-11.025 v1(0.198,-11.025) ; R15.2 v1(1.9,-13.325) R8.1
NetR9_1: R9.1 U1.24 | length 2.1
  Bottom Layer w0.152: U1.24 -2.008,-8.179 -2.008,-6.843 R9.1
NetR10_1: R10.1 U1.23 | length 1.9
  Bottom Layer w0.152: U1.23 -2.5,-6.335 R10.1
NetR11_1: R11.1 R13.2 U1.6 | length 5.1
  Bottom Layer w0.152: U1.6@-1.045,-11.338 -0.862,-11.338 -0.7,-11.5 -0.7,-11.9 0.2,-12.8 0.2,-14.65 ; R13.2 -0.025,-14.625 ; -0.025,-14.65 0.2,-14.65 ; R11.1 0.2,-14.65
NetR19_2: R19.2 U3.14 | length 1.6
  Bottom Layer w0.203: U3.14 R19.2
NetR20_2: R20.2 U3.13 | length 1.6
  Bottom Layer w0.203: U3.13 R20.2
NetR21_2: R21.2 U3.3 | length 12
  Bottom Layer w0.152: R21.2 -1.194,2.419 -0.669,2.419 1.275,0.475 4.275,0.475 7.295,-2.545 7.295,-3.595 U3.3
NetR23_2: R23.2 U3.11 | length 1.6
  Bottom Layer w0.203: U3.11 R23.2
NetR24_2: R24.2 U3.10 | length 1.6
  Bottom Layer w0.203: U3.10 R24.2
NetR25_2: R25.2 U3.7 | length 1.9
  Bottom Layer w0.152: R25.2 1.425,-3.8 U3.7
NetR27_1: R27.1 U2.6 | length 10.6
  Top Layer w0.152: v1(-11.1,-1.025) -6.425,-1.025 -5.225,-2.225 -5.225,-4.601 -5.45,-4.826 v1(-5.45,-4.95)
  Bottom Layer w0.152: U2.6@-11.808,-1.513 -11.583,-1.513 -11.1,-1.029 v1(-11.1,-1.025) ; R27.1 -5.459,-5.448 -5.459,-4.959 v1(-5.45,-4.95)
NetR30_2: R30.2 U3.12 | length 1.6
  Bottom Layer w0.203: U3.12 R30.2
NetR33_1: R33.1 U1.18 | length 2.9
  Bottom Layer w0.203: R33.1 -6.475,-8.231 -5.867,-8.838 U1.18
PGOOD: R27.2 U1.19 | length 2.3
  Bottom Layer w0.152: R27.2 -5.374,-6.401 -5.374,-6.726 -4.5,-7.6 U1.19
PREVGH: C14.1 CN1.4 D3.K | length 7.1
  Top Layer w0.381: v2(-6.2,11.9) -4.258,13.842 -4.258,14.042 v2(-4.2,14.1)
  Bottom Layer w0.203: CN1.4 -4.25,14.15 v2(-4.2,14.1)
  Bottom Layer w0.381: v2(-6.2,11.9) -6.2,10.4 -6.2,9.138 D3.K@-6.1,9.038
PREVGL: C16.1 CN1.2 D1.A | length 9.8
  Top Layer w0.381: v2(-6.6,12.8) -6.6,12.724 -6.9,12.424 -6.9,11.423 -6.477,11 v2(-3.75,11)
  Bottom Layer w0.381: v2(-6.6,12.8) -6.584,12.816 -6.584,13.316 -5.25,14.65 CN1.2 ; D1.A@-3.9,9.038 -3.75,9.188 v2(-3.75,11)
RESE: CN1.22 Q1.2 R17.2 | length 19.5
  Top Layer w0.152: v1(-8,12.9) -5.9,15 4.3,15 5.4,13.9 v1(5.4,13.792)
  Bottom Layer w0.152: R17.2 v1(-8,12.9) ; CN1.22 4.75,14.45 5.4,13.8 v1(5.4,13.792)
  Bottom Layer w0.381: R17.2 -8.531,12.856 Q1.2
RST: P2.3 R22.2 U3.4 | length 4.8
  Bottom Layer w0.152: R22.2 5.125,-6.675 P2.3 6.4,-5.4 U3.4
SCL: R28.2 U3.6 U4.6 | length 13.5
  Top Layer w0.152: v1(4.2,-4.8) 4.2,-7.4 6.3,-9.5 6.3,-12.5 v1(6.5,-12.7)
  Bottom Layer w0.152: v1(4.2,-4.8) U3.6 ; R28.2 v1(6.5,-12.7) 6.5,-12.869 6.856,-13.225 U4.6
SDA: R29.2 U3.5 U4.5 | length 16.5
  Top Layer w0.152: v1(5.3,-4.8) 6.179,-5.679 6.179,-8.773 6.7,-9.294 6.7,-12.075 7.033,-12.408 7.033,-12.921 6.721,-13.233 6.279,-13.233 6.057,-13.011 5.859,-13.011 v1(5.772,-12.924)
  Bottom Layer w0.152: v1(5.3,-4.8) U3.5 ; R29.2 5.661,-12.286 5.661,-12.615 5.969,-12.924 v1(5.772,-12.924) 6.081,-13.233 6.433,-13.233 6.75,-13.55 8.475,-13.55 8.8,-13.875 U4.5
SUPERCAP_EH: C20.+ C26.+ D5.K R33.2 U1.17 | length 30.1
  Top Layer w0.381: C26.+ -6.395,-3.705 -6.395,-5.08 -5.175,-6.3 -0.775,-6.3 -0.375,-6.7 v2(-0.375,-7.95)
  Top Layer w0.5: C20.+ -12.775,-3.875 C26.+@-6.798,-3.875
  Bottom Layer w0.381: C26.+ -6.8,-5.05 -7.325,-5.575 R33.2 -7.325,-8.275 -6.262,-9.338 U1.17 ; v2(-0.375,-7.95) -0.317,-8.008 -0.101,-8.008 -0.009,-8.1 0.775,-8.1 2.591,-9.915 2.94,-9.915 D5.K
SWCLK: P2.4 U3.2 | length 3.4
  Bottom Layer w0.152: P2.4 8.6,-5.2 U3.2
SWDIO: P2.5 U3.1 | length 3
  Bottom Layer w0.152: P2.5 9.2,-6.192 9.7,-5.692 U3.1
VCOM: C11.1 CN1.1 | length 1.9
  Bottom Layer w0.203: C11.1 -7.221,14.302 -7.075,14.448 -7.038,14.448 -6.248,15.238 CN1.1
Vsolar: C1.1 L1.1 P1.1 R1.2 U1.10 | length 13
  Bottom Layer w0.254: R1.2 -3.501,-13.381 -3.501,-11.991 U1.10
  Bottom Layer w0.381: P1.1 -14.01,-14.05 C1.1 -9.725,-14.05 -9.275,-14.5 -7.25,-14.5 -6.132,-13.382 R1.2
VSYS: C12.1 R9.2 R10.2 U1.16 | length 16
  Top Layer w0.203: v1(-8.975,-8.275) -8.975,-8.175 -7.825,-7.025 v1(-1.023,-7.025)
  Bottom Layer w0.203: v1(-8.975,-8.275) -8.475,-8.275 C12.1 ; R10.2 R9.2 ; R9.2@-1.471,-5.461 R9.2 ; v1(-1.023,-7.025) -0.945,-6.947 -0.945,-6.634 -0.942,-6.631 -0.942,-5.684 -1.061,-5.565 -1.362,-5.565 R9.2
  Bottom Layer w0.254: C12.1 -6.912,-9.838 U1.16
pads on no net: CN1.6 CN1.18 CN1.19 CN1.24 CN1.MP1 CN1.MP2 U2.3

## Polygon pours and split planes (outlines as drawn)
GND on Bottom Layer "GND_L02_P035" (solid, remove dead copper, pour order 35): 12.46,-15 ccw(c12.46,-12.46) 15,-12.46 15,13 ccw(c13,13) 13,15 -12.46,15 ccw(c-12.46,12.46) -15,12.46 -15,-12.46 ccw(c-12.46,-12.46) -12.46,-15
3V3_EP on Bottom Layer "3V3_EP_L02_P033" (solid, remove dead copper, pour order 33): -7.6,4.7 -7.1,4.2 -7.1,1.3 -7.5,0.9 -10.9,0.9 -12,2 -12,4.2 -11.5,4.7
NetC13_2 on Bottom Layer "NETC13_2_L02_P034" (solid, remove dead copper, pour order 34): -7.3,4.9 -6.9,4.5 -6.9,3.3 -6.5,2.9 -5.2,2.9 -4.9,3.2 -4.9,6.5 -6,7.6 -6.8,7.6 -8.7,9.5 -10.2,9.5 -11.7,8 -11.7,5.3 -11.3,4.9
GND on Top Layer "GND_L01_P036" (solid, remove dead copper, pour order 36): -12,12 -12,-12 12,-12 12,12
GND on Top Layer "GND_L01_P037" (solid, remove dead copper, pour order 37): -8.035,-11.75 -8.035,-12.665 -6.15,-14.55 -4.375,-14.55 -4.2,-14.375 -4.2,-11.75

## Keep-outs
Top Layer:
  rectangle: 10.2,-8.8 16.3,11.3
  region: -10.705,-10.802 -8.2,-10.802 -8.2,-14.998 -8.205,-15.002 -10.705,-15.002
Bottom Layer:
  rectangle: 10.2,-8.8 16.3,11.3
  region: -10.705,-10.802 -8.2,-10.802 -8.2,-14.998 -8.205,-15.002 -10.705,-15.002
Keep-Out Layer:
  the board outline again, w0.2

## Silkscreen, mask and mechanical layers (free items; w line width, h text height)
Top Overlay:
  lines w0.254: -15.025,-3.6 -13.625,-3.6 ; -14.325,-4.3 -14.325,-2.9 ; -12.625,-14.35 -11.225,-14.35 ; -11.95,-12.3 -11.95,-10.9 ; -11.925,-15.05 -11.925,-13.65 ; -7.5,-1.1 -6.1,-1.1 ; -6.8,-1.8 -6.8,-0.4
  lines w0.5: -0.2,-7.5 -0.2,-5.7
Bottom Overlay:
  lines w0.254: -15,-16.5 -13.6,-16.5 ; -14.3,-17.2 -14.3,-15.8 ; -12.6,-5.1 -11.2,-5.1 ; -11.9,-5.8 -11.9,-4.4
  lines w0.5: -0.2,-7.5 -0.2,-5.7
  text "v1.5" at 14.244,12.618 h2
Top Solder:
  drawing of 80 lines, arcs and shapes, not listed